# Altium PCB Driver_PCB.PcbDoc
Units mm, origin at the board's own origin, x right, y up, seen from the top; angles counter-clockwise.
Board outline 35.25 x 26.31 mm, 2 copper layers (Top Layer, Bottom Layer); 50 components, 48 nets, 194 pads, 59 vias.
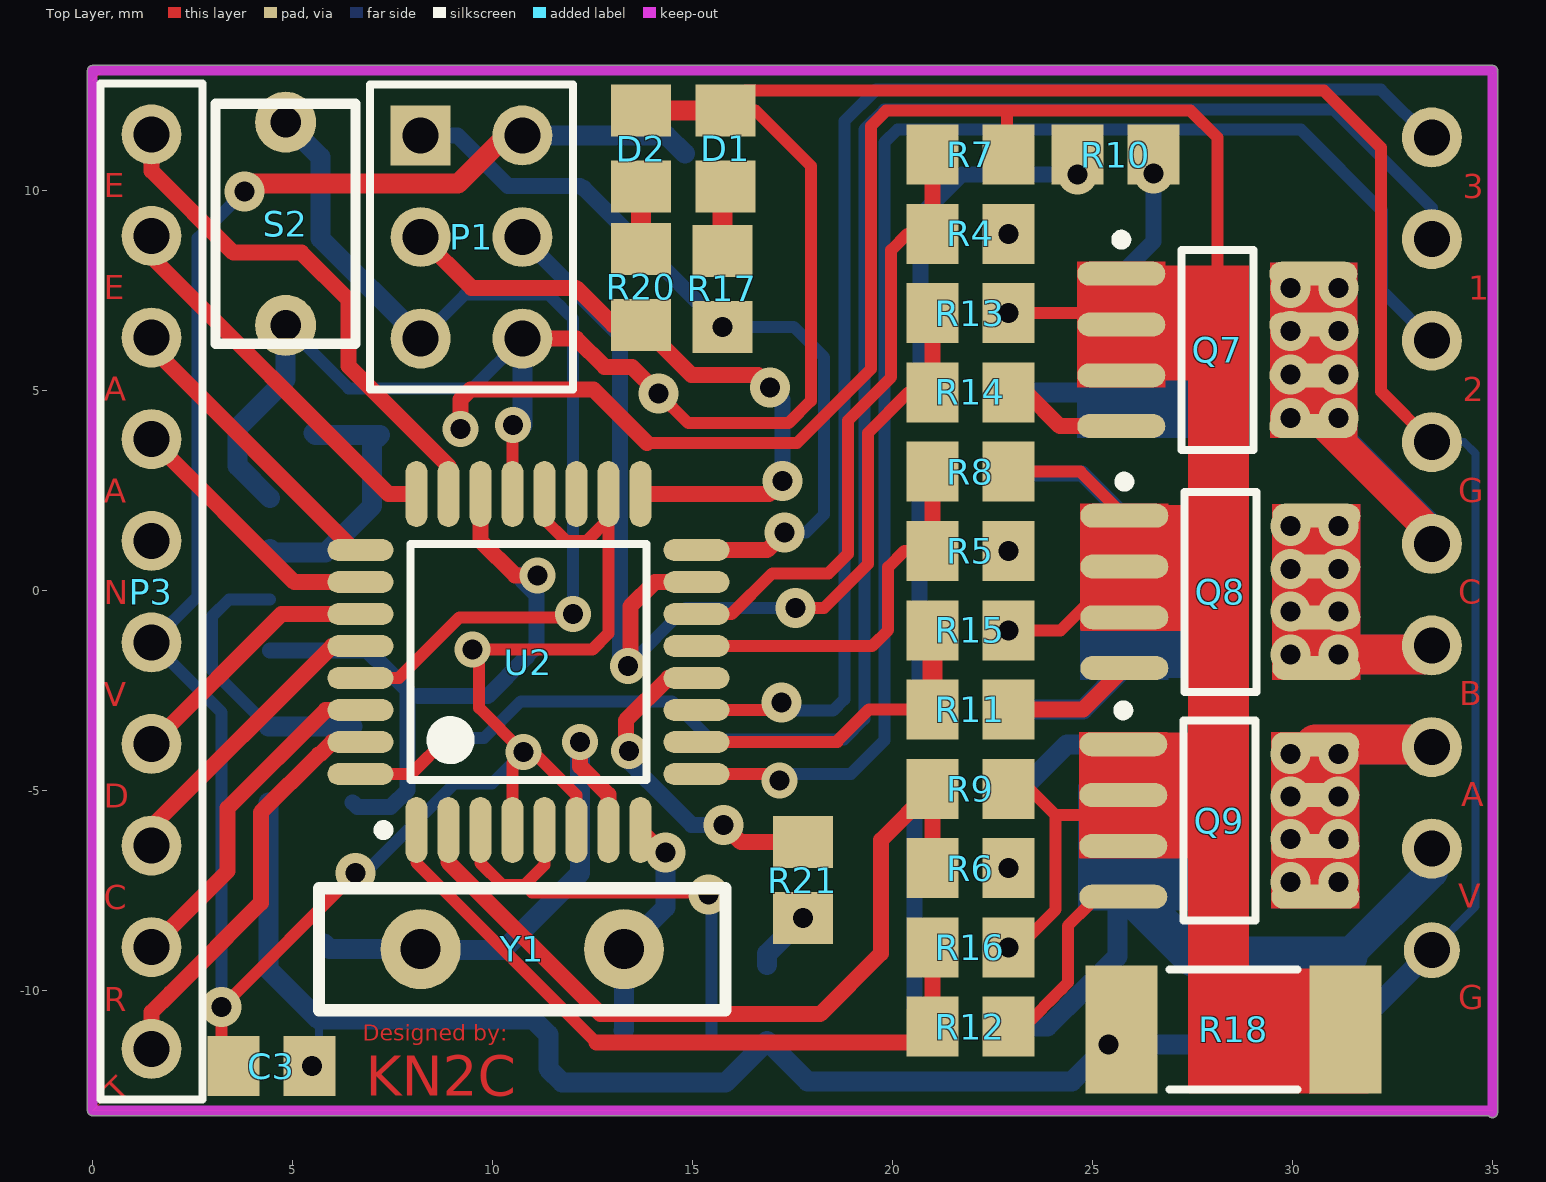
[diagram p0: Top Layer view]
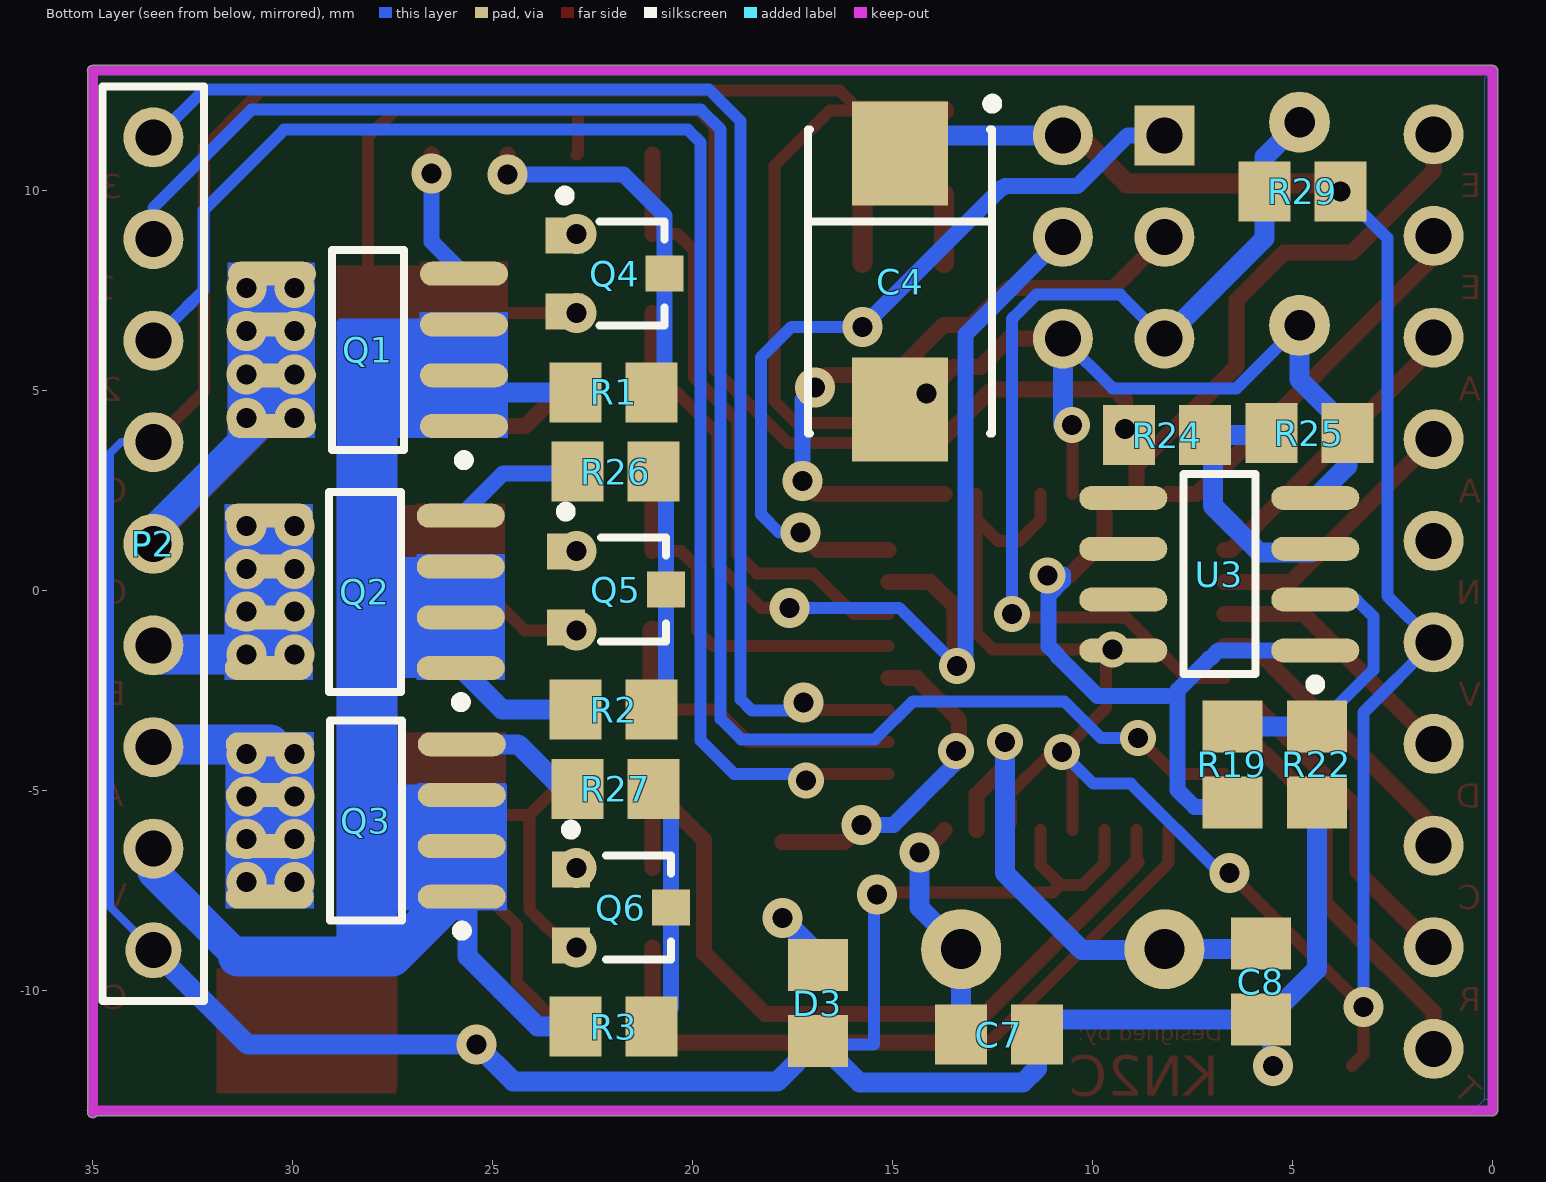
[diagram p1: Bottom Layer view, seen from below]

## Layer stack, top to bottom
Top Layer: signal copper 0.0356
Dielectric: dielectric 0.32, FR-4, Dk 4.8
Bottom Layer: signal copper 0.0356

## Board outline
-0.127,-13 ccw(c0,-13) 0,-13.127 34.895,-13.127 ccw(c34.997,-13.051) 35.125,-13.051 35.125,-13.027 ccw(c35,-13) 35.127,-13 ccw(c35,-13) 35.125,-12.973 35.125,12.949 ccw(c34.997,12.949) 35.123,12.968 ccw(c35,13) 35.127,13 ccw(c35,13) 35,13.127 0,13.127 ccw(c0,13) -0.127,13

## Design rules (kind name [scope] priority, off if disabled: settings)
Clearance Clearance_2 [InPolygon vs InNet('GND')] p1 off: gap=0
Clearance Clearance_1 [InPolygon] p2: gap=0.3
Clearance [All] p3: gap=0.2
FabricationTestPointUsage TestPointUsage [All] p1: valid=0 allowmultiple=FALSE
FabricationTestpoint Testpoint [(IsPad And (OnTopLayer Or OnBottomLayer))] p1: side=3 testpointundercomponent=TRUE minsize=1.016 maxsize=2.54 preferedsize=1.524 minholesize=0 maxholesize=1.016 preferedholesize=0.813 testpointgrid=0.025 allowsidetop=TRUE allowsidebottom=TRUE usegrid=TRUE gridtolerance=0
HoleToHoleClearance [All] p1: gap=0.254 allowstackedmicrovias=FALSE
PolygonConnect [All] p1: connectstyle=Direct reliefconductorwidth=0.254 reliefentries=4 polygonreliefangle="90 Angle" airgapwidth=0.254
RoutingVias [All] p1: holewidth=0.5 width=1 viastyle="Through Hole" minholewidth=0.5 minwidth=0.9 maxholewidth=0.5 maxwidth=1
SilkToSolderMaskClearance SilkscreenOverComponentPads [IsPad] p1: minsilkscreentomaskgap=0.254 clearancetoexposedcopper=TRUE
SolderMaskExpansion [All] p1: expansion=0.102
Width [All] p1: maxlimit=3 minlimit=0.2 preferedwidth=0.2
24 further rules are at their usual default settings.

## Classes and differential pairs
component class Driver_Mosfet: C3 C4 Q1 Q2 Q3 Q4 Q5 Q6 Q7 Q8 Q9 R1 R2 R3 R4 R5 R6 R7 R8 R9 R10 R11 R12 R13 R14 R15 R16 R18 R26 R27
component class Driver_Sheet: C7 C8 D1 D2 D3 P1 P2 P3 R17 R19 R20 R21 R22 R24 R25 R29 S2 U2 U3 Y1

## Components (designator, comment, footprint, x,y, rotation, side; value= is the part's Value field where it differs from the comment)
C3 "Cap_UP" 2012[0805] 4.47,-11.887 r0 top
C4 "Cap_El" 7343 14.808,7.722 r270 bottom
C7 "Cap_UP" 2012[0805] 12.344,-11.1 r0 bottom
C8 "Cap_UP" 2012[0805] 5.791,-9.779 r90 bottom
D1 "Diode" 2012[0805] 15.824,11.049 r90 top
D2 "Diode" 2012[0805] 13.716,11.049 r90 top
D3 "Diode" 2012[0805] 16.866,-10.312 r270 bottom
P1 "Header 3X2" HDRBOX2X3 9.474,8.839 r270 top
P2 "Header 9" HDR1X9 33.48,-8.992 r90 bottom
P3 "Header 10" HDR1X10 1.473,-11.455 r90 top
Q1 "MOSFET-P-8PIN" SO-8_N 28.118,6.016 r0 bottom
Q2 "MOSFET-P-8PIN" SO-8_N 28.194,-0.033 r0 bottom
Q3 "MOSFET-P-8PIN" SO-8_N 28.169,-5.748 r0 bottom
Q4 "2N2222" SOT-23 21.946,7.925 r270 bottom
Q5 "2N2222" SOT-23 21.92,0.025 r270 bottom
Q6 "2N2222" SOT-23 21.793,-7.925 r270 bottom
Q7 "MOSFET-N-8PIN" SO-8_N 28.118,6.016 r0 top
Q8 "MOSFET-N-8PIN" SO-8_N 28.194,-0.033 r0 top
Q9 "MOSFET-N-8PIN" SO-8_N 28.169,-5.748 r0 top
R1 "Res" 2012[0805] 21.971,4.952 r0 bottom
R2 "Res" 2012[0805] 21.971,-2.974 r0 bottom
R3 "Res" 2012[0805] 21.971,-10.9 r0 bottom
R4 "Res" 2012[0805] 21.946,8.915 r180 top
R5 "Res" 2012[0805] 21.946,0.989 r180 top
R6 "Res" 2012[0805] 21.946,-6.937 r180 top
R7 "Res" 2012[0805] 21.946,10.897 r180 top
R8 "Res" 2012[0805] 21.946,2.971 r180 top
R9 "Res" 2012[0805] 21.946,-4.955 r180 top
R10 "Res" 2012[0805] 25.578,10.897 r0 top
R11 "Res" 2012[0805] 21.946,-2.974 r0 top
R12 "Res" 2012[0805] 21.946,-10.9 r0 top
R13 "Res" 2012[0805] 21.946,6.934 r180 top
R14 "Res" 2012[0805] 21.946,4.952 r0 top
R15 "Res" 2012[0805] 21.946,-0.992 r180 top
R16 "Res" 2012[0805] 21.946,-8.918 r180 top
R17 "Res" 2012[0805] 15.748,7.544 r90 top
R18 "DAIL" 6332[2512] 28.524,-10.973 r0 top
R19 "Res" 2012[0805] 6.502,-4.343 r90 bottom
R20 "Res" 2012[0805] 13.716,7.595 r90 top
R21 "Res" 2012[0805] 17.755,-7.239 r270 top
R22 "Res" 2012[0805] 4.394,-4.343 r270 bottom
R24 "Res" 2012[0805] 8.133,3.886 r0 bottom
R25 "Res" 2012[0805] 4.577,3.937 r0 bottom
R26 "Res" 2012[0805] 21.921,2.971 r0 bottom
R27 "Res" 2012[0805] 21.921,-4.956 r0 bottom
R29 "Res" 2012[0805] 4.75,9.982 r180 bottom
S2 "SW-SPST" PUSH-BUT-SMD 4.826,9.169 r180 top
U2 "ATmega88PA-AU" 32A_N 10.897,-1.787 r90 top
U3 "LM358D" 751-02_N 6.833,0.41 r0 bottom
Y1 "XTAL" XTALL 10.744,-8.966 r90 top

## Footprints (in the part's own frame and the unit in brackets; to place one, negate y for a bottom-side part, rotate by r counter-clockwise, add the part's x,y. Pads: shape width x height; smd on the part's side, far side on the other; paste and mask are expansions set on the pad)
32A_N [mm] "Thin QFP, 32-Leads, Body 7x7mm, Pitch 0.8mm, IPC Medium Density"
  oval 1.65x0.55 smd: 1(-4.2,2.8) 2(-4.2,2) 3(-4.2,1.2) 4(-4.2,0.4) 5(-4.2,-0.4) 6(-4.2,-1.2) 7(-4.2,-2) 8(-4.2,-2.8) 17(4.2,-2.8) 18(4.2,-2) 19(4.2,-1.2) 20(4.2,-0.4) 21(4.2,0.4) 22(4.2,1.2) 23(4.2,2) 24(4.2,2.8)
  oval 0.55x1.65 smd: 9(-2.8,-4.2) 10(-2,-4.2) 11(-1.2,-4.2) 12(-0.4,-4.2) 13(0.4,-4.2) 14(1.2,-4.2) 15(2,-4.2) 16(2.8,-4.2) 25(2.8,4.2) 26(2,4.2) 27(1.2,4.2) 28(0.4,4.2) 29(-0.4,4.2) 30(-1.2,4.2) 31(-2,4.2) 32(-2.8,4.2)
  silkscreen extent -4.32,-2.95 2.95,3.75, body extent -3.5,-3.5 3.5,3.5, height 1.2
751-02_N [mm] "SOIC, 8-Leads, Body 4.9x3.9mm, Pitch 1.27mm, IPC Medium Density"
  oval 2.2x0.6 smd: 1(-2.4,1.905) 2(-2.4,0.635) 3(-2.4,-0.635) 4(-2.4,-1.905) 5(2.4,-1.905) 6(2.4,-0.635) 7(2.4,0.635) 8(2.4,1.905)
  silkscreen extent -2.52,-2.5 0.9,2.88, body extent -1.95,-2.45 1.95,2.45, height 1.75
2012[0805] [mm] "Chip Resistor; Body 2.0 x 1.3 mm (LxW typ)"
  rect 1.3x1.5 smd: 1(-0.95,0) 2(0.95,0)
  body extent -1.22,-0.75 1.28,0.75, height 0.5
6332[2512] [mm] "Chip Resistor; Body 6.3 x 3.2 mm (LxW typ)"
  rect 1.8x3.2 smd: 1(-2.8,0) 2(2.8,0)
  silkscreen extent -1.6,-1.5 1.6,1.5, body extent -3.27,-1.6 3.37,1.6, height 0.5
7343 [mm] "Capacitor, SM Tantalum; Body 7.3 x 4.3 mm (LxW typ)"
  rect 2.6x2.4 smd: 1(-3.2,0) 2(3.2,0)
  silkscreen extent -4.57,-2.3 3.8,2.42, body extent -3.9,-2.4 3.9,2.4, height 2
HDR1X9 [mm] "Connector; Header; 9 Position"
  round 1.4 hole 0.9: 1(0,0)
  round 1.5 hole 0.9: 2(2.54,0) 3(5.08,0) 4(7.62,0) 5(10.16,0) 6(12.7,0) 7(15.24,0) 8(17.78,0) 9(20.32,0)
  silkscreen extent -1.27,-1.27 21.59,1.27
HDR1X10 [mm] "Connector; Header; 10 Position"
  round 1.5 hole 0.9: 1(0,0) 2(2.54,0) 3(5.08,0) 4(7.62,0) 5(10.16,0) 6(12.7,0) 7(15.24,0) 8(17.78,0) 9(20.32,0) 10(22.86,0)
  silkscreen extent -1.27,-1.27 24.13,1.27
HDRBOX2X3 [mm]
  rect 1.5x1.5 hole 0.9: 1(-2.54,-1.27)
  round 1.5 hole 0.9: 2(-2.54,1.27) 3(0,-1.27) 4(0,1.27) 5(2.54,-1.27) 6(2.54,1.27)
  silkscreen extent -3.81,-2.54 3.81,2.54
PUSH-BUT-SMD [mil]
  round 60 hole 30: 1(0,-100) 2(0,100)
  silkscreen extent -69,-118 69,118, body extent -69,-118 68,117, height 157
SO-8_N [mm] "8-Pin Small Outline Integrated Circuit 1.27 mm Pitch, IPC Medium Density"
  oval 2.2x0.6 smd: 1(-2.4,1.905) 2(-2.4,0.635) 3(-2.4,-0.635) 4(-2.4,-1.905) 5(2.4,-1.905) 6(2.4,-0.635) 7(2.4,0.635) 8(2.4,1.905)
  silkscreen extent -2.52,-2.5 0.9,2.88, body extent -1.95,-2.45 1.95,2.45, height 1.75
SOT-23 [mm] "SOT-23; 3 Leads; Body 3.0 x 2.6 mm, inc. leads (LxW max)"
  rect 0.9x0.95 smd: 1(0,1.25) 2(-0.95,-1.25) 3(0.95,-1.25)
  silkscreen extent -2.07,-1.38 1.3,1.25, body extent -1.33,-0.38 1.32,1.25, height 2
XTALL [mm]
  round 2 hole 1: 1(0,-2.54) 2(0,2.54)
  silkscreen extent -1.52,-5.08 1.52,5.08

## Part data
C3 C4 C7 C8: "Capacitor"
D1 D2 D3: "1 Amp General Purpose Rectifier"
P1: "Header, 3-Pin, Dual row"
P2: "Header, 9-Pin"
P3: "Header, 10-Pin"
Q1 Q2 Q3: "P-Channel MOSFET"
Q4 Q5 Q6: "NPN Bipolar Transistor"
Q7 Q8 Q9: "N-Channel MOSFET"
R1 R2 R3 R4 R5 R6 R7 R8 R9 R10 R11 R12 R13 R14 R15 R16 R17 R19 R20 R21 R22 R24 R25 R26 R27 R29: "Semiconductor Resistor"
R18: library part Res, "Semiconductor Resistor"
S2: "Single-Pole, Single-Throw Switch"
U2: "8-bit AVR Microcontroller, 8KB Flash, 512 Bytes EEPROM, 1KB SRAM, 32-pin TQFP, Industrial Grade (-40°C to 85°C)"
U3: "Dual Low-Power Operational Amplifier"
Y1: "Crystal Oscillator"

## Via types
v1: diameter 1, hole 0.5, Top Layer to Bottom Layer, 48 vias
v2: diameter 0.9, hole 0.5, Top Layer to Bottom Layer, 11 vias

## Nets (pads, with @x,y where several pads share a name; then routed paths per layer and width w, separated by ;. In a path a pad name is that pad's centre, name@x,y a point inside that pad or via, vN(x,y) a via of type N, cw(c..) or ccw(c..) an arc to the next point about the centre after c; other vN are vias at no path point)
ADD1: P3.8 U2.25 | length 7.5
  Top Layer w0.4: P3.8@1.473,6.237 1.473,6.085 6.545,1.013 U2.25
ADD2: P3.7 U2.26 | length 6.7
  Top Layer w0.4: P3.7 5.045,0.213 U2.26
CURRENT: R19.1 U2.22 U3.1 | length 17
  Top Layer w0.4: U2.22 9.697,1.251 10.566,0.381 v2(11.125,0.381)
  Bottom Layer w0.4: U3.1 6.854,-1.495 7.061,-1.702 7.087,-1.702 7.874,-2.489 7.874,-4.988 7.452,-5.41 6.619,-5.41 R19.1 ; 8.153,-2.642 9.876,-2.642 10.86,-1.657 10.86,-1.634 11.1,-1.394 11.1,-0.113 ; v2@10.744,0.243 11.1,-0.113 ; v2@10.744,0.243 10.744,0.406 v2@10.744,0.243 ; v2@10.744,0.243 11.1,-0.113
CURRENT_SENSE: Q4.3 Q5.3 Q6.3 Q7.1 Q7.2 Q7.3 Q8.1 Q8.2 Q8.3 Q9.1 Q9.2 Q9.3 R7.1 R8.1 R9.1 R13.1 R15.1 R16.1 R18.2 R24.2 | length 53.4
  Top Layer w0.3: 13.462,4.084 13.863,3.683 17.606,3.683 19.456,5.533 19.456,11.612 19.791,11.947 ; 22.86,11.997 22.86,10.932 R7.1 ; v1(22.896,-8.918) 23.136,-8.918 24.079,-7.976 24.079,-5.613 ; R9.1 23.421,-4.955 24.079,-5.613 ; v1(22.896,-0.992) 24.2,-0.992 Q8.2 ; R8.1 24.695,2.971 Q8.1 ; v1(22.896,6.934) 25.436,6.934 Q7.2 ; Q9.2 25.269,-5.613 24.079,-5.613 ; 28.118,6.016 28.118,11.328 27.45,11.997 19.841,11.997 ; 19.791,11.947 19.841,11.997 ; 19.791,11.947 19.841,11.997
  Top Layer w0.4: v2@9.195,4.156 9.195,4.775 9.449,5.029 12.517,5.029 13.863,3.683
  Top Layer w0.5: 25.718,7.515 Q7.1
  Top Layer w0.75: 25.718,6.245 Q7.2 25.718,7.515
  other v2: 9.195,4.039
ENCODER1: P3.10 U2.23 | length 13.1
  Top Layer w0.4: P3.10 1.473,10.491 3.518,8.446 5.219,8.446 6.401,7.264 6.401,5.614 8.897,3.118 U2.23
ENCODER2: P3.9 U2.24 | length 9.6
  Top Layer w0.4: P3.9 1.473,8.339 7.399,2.413 U2.24
GND: C3.2 C4.2 C7.1 C8.1 D1.2 D2.2 D3.2 P1.6 P2.1 P2.6 R18.1 R22.2 R25.1 S2.2 U2.3 U2.5 U2.21 U3.4 | length 127.7
  Top Layer w0.2: C3.2 v1(5.486,-11.887)
  Top Layer w0.3: U2.3 9.697,-6.811 10.244,-7.358 10.803,-7.358 ; U2.21 v2@10.497,3.88 ; U2.5 11.297,-6.864 10.803,-7.358 ; v1(14.148,4.928) 14.892,4.183 17.399,4.183 17.958,4.742 17.958,10.617 16.576,11.999 D1.2 16.322,12.497 30.785,12.497 32.21,11.072 ; v1(15.392,-7.595) 15.342,-7.544 10.989,-7.544 10.803,-7.358 ; 31.013,12.268 32.21,11.072 ; P2.6 32.21,4.978 32.21,11.072
  Top Layer w0.4: P1.6 12.096,6.299 12.8,5.595 13.481,5.595 v1(14.148,4.928)
  Top Layer w0.5: D2.2 D1.2
  Bottom Layer w0.2: v1(5.486,-11.887) 5.655,-11.719 C8.1@5.655,-10.729 ; P2.1 34.57,-7.901 34.57,3.429 34.291,3.708 P2.6
  Bottom Layer w0.3: S2.2 6.401,5.055 9.5,5.055 P1.6 ; v1(15.392,-7.595) 15.469,-7.671 15.469,-11.354 16.774,-11.354 D3.2
  Bottom Layer w0.5: R22.2 4.394,-9.468 5.655,-10.729 C8.1 11.024,-10.729 C7.1 11.394,-11.953 11.741,-12.3 14.685,-12.3 15.828,-12.3 D3.2@16.774,-11.354 ; U3.4 3.627,3.12 R25.1 3.627,4.073 4.826,5.272 S2.2 ; v2@10.744,4.14 P1.6 ; D3.2 17.871,-12.268 24.486,-12.268 v1(25.4,-11.354) 31.118,-11.354 P2.1
  other v2: 10.516,4.14
HALL1: P2.8 U2.32 | length 44.9
  Top Layer w0.3: U2.32 7.961,-4.587 v2(8.865,-3.683)
  Bottom Layer w0.3: v2(8.865,-3.683) 9.792,-3.683 10.706,-2.769 14.491,-2.769 15.442,-3.72 18.784,-3.72 19.296,-3.208 19.296,11.528 19.791,12.023 31.026,12.023 33.48,9.569 P2.8
HALL2: P2.7 U2.9 | length 37.8
  Top Layer w0.3: U2.9 v2@17.156,-4.587 ; v2@17.007,-4.587 v2(17.17,-4.75)
  Bottom Layer w0.3: v2@17.156,-4.587 18.959,-4.587 19.796,-3.75 19.796,11.201 20.118,11.523 30.209,11.523 32.233,9.5 32.233,7.496 32.334,7.394 ; 32.64,7.088 32.334,7.394 ; P2.7 32.334,7.394
HALL3: P2.9 U2.11 | length 34.7
  Top Layer w0.3: U2.11 v1@16.978,-2.987
  Bottom Layer w0.3: v1@17.094,-2.997 18.517,-2.997 18.796,-2.718 18.796,11.735 19.584,12.523 31.233,12.523 ; 30.226,12.523 31.233,12.523 ; P2.9 33.401,11.328 32.206,12.523 31.233,12.523
  other v1: 17.221,-2.794
LED1: R21.1 U2.12 | length 8.8
  Top Layer w0.4: v2@13.335,-4.013 13.335,-3.244 14.392,-2.187 U2.12 ; v1(15.773,-5.857) 16.205,-6.289 R21.1
  Bottom Layer w0.4: v2(13.411,-4.013) 13.411,-4.293 13.614,-4.496 ; 13.894,-4.775 13.614,-4.496 ; v1(15.773,-5.857) 14.976,-5.857 13.614,-4.496
LED2: P1.1 R17.1 U2.16 | length 20
  Top Layer w0.4: U2.16 16.863,1.013 v1(17.297,1.448)
  Bottom Layer w0.2: v1@15.664,6.51 v1@15.748,6.426
  Bottom Layer w0.3: v1(15.748,6.594) 17.526,6.594 18.288,5.832 18.288,1.905 17.831,1.448 v1(17.297,1.448)
  Bottom Layer w0.4: P1.1 9.118,11.379 10.388,10.109 12.192,10.109 12.243,10.058 12.283,10.058 v1(15.748,6.594)
LED3: P1.3 R20.1 U2.17 | length 16
  Top Layer w0.4: P1.3 9.474,7.569 12.09,7.569 13.015,6.645 R20.1 14.976,5.385 v1@16.637,5.385 ; U2.17 16.917,2.413 v1(17.247,2.743)
  Bottom Layer w0.4: v1@16.967,5.08 16.967,5.055 17.247,4.775 v1(17.247,2.743)
  other v1: 16.942,5.08
M1N: R12.1 R16.2 U2.1 | length 31
  Top Layer w0.3: U2.1 8.097,-6.801 12.598,-11.303
  Top Layer w0.4: 16.053,-11.303 16.789,-11.303 ; R16.2 R12.1 20.593,-11.303 16.789,-11.303 ; 12.598,-11.303 16.789,-11.303 ; 12.598,-11.303 16.789,-11.303 ; 12.598,-11.303 16.789,-11.303 ; 12.598,-11.303 16.789,-11.303
M1P: R6.2 R9.2 U2.2 | length 24.4
  Top Layer w0.3: U2.2@8.897,-6.788 U2.2
  Top Layer w0.4: U2.2@8.897,-6.788 12.7,-10.592 ; 16.129,-10.592 16.408,-10.592 ; R6.2 R9.2 19.71,-6.241 19.71,-9.068 18.186,-10.592 16.408,-10.592 ; 12.7,-10.592 16.408,-10.592 ; 12.7,-10.592 16.408,-10.592
M2N: R11.1 R15.2 U2.10 | length 18.8
  Top Layer w0.3: 18.593,-3.787 19.406,-2.974 R11.1 ; U2.10 18.618,-3.787 ; U2.10 18.618,-3.787 ; U2.10 18.618,-3.787 ; U2.10 18.618,-3.787
  Top Layer w0.5: R11.1 R15.2
M2P: R5.2 R8.2 U2.13 | length 9.8
  Top Layer w0.3: U2.13 19.492,-1.387 19.888,-0.991 19.888,0.584 20.293,0.989 R5.2
  Top Layer w0.4: R5.2 R8.2
M3N: P1.4 R13.2 R14.1 U2.15 | length 29.6
  Top Layer w0.3: v1(17.577,-0.432) 18.288,-0.432 19.38,0.66 19.38,3.937 20.395,4.952 R14.1
  Top Layer w0.4: v2(13.386,-1.88) 13.447,-1.819 13.447,-0.396 14.056,0.213 U2.15 ; R14.1 R13.2
  Bottom Layer w0.3: v2(13.386,-1.88) 14.834,-0.432 v1(17.577,-0.432)
  Bottom Layer w0.4: P1.4 13.183,6.401 13.183,-1.677 v2(13.386,-1.88)
M3P: R4.2 R7.2 U2.14 | length 15.6
  Top Layer w0.3: U2.14 15.974,-0.587 16.993,0.432 18.398,0.432 18.88,0.914 18.88,4.25 19.964,5.334 19.964,8.509 20.371,8.915 R4.2
  Top Layer w0.4: R4.2 R7.2
NetC7_2: C7.2 U2.8 Y1.1 | length 5.7
  Top Layer w0.4: U2.8 14.263,-6.553 v1(14.326,-6.553)
  Bottom Layer w0.5: C7.2@13.269,-10.998 13.284,-10.983 Y1.1 14.326,-7.925 v1(14.326,-6.553)
NetC8_2: C8.2 U2.7 Y1.2 | length 13
  Top Layer w0.4: v2(12.192,-3.785) 12.192,-4.394 12.897,-5.099 U2.7
  Bottom Layer w0.5: C8.2 5.928,-8.966 Y1.2 8.23,-8.992 10.262,-8.992 12.192,-7.061 v2(12.192,-3.785)
NetD1_1: D1.1 R17.2 | length 1.7
  Top Layer w0.5: R17.2@15.748,8.189 D1.1@15.748,9.896
NetD2_1: D2.1 R20.2 | length 1.7
  Top Layer w0.5: R20.2@13.716,8.189 D2.1@13.716,9.896
NetD3_1: D3.1 R21.2 | length 1.5
  Bottom Layer w0.5: D3.1 16.866,-9.078 v1(17.755,-8.189)
NetQ1_4: Q1.4 R10.2 | length 3.3
  Top Layer w0.4: v1(26.528,10.429) R10.2
  Bottom Layer w0.4: Q1.4 26.528,8.731 v1(26.528,10.429)
NetQ2_4: Q2.4 R26.2 | length 3.4
  Bottom Layer w0.4: R26.2 22.91,2.931 24.734,2.931 Q2.4
NetQ3_4: Q3.4 R27.2 | length 3.4
  Bottom Layer w0.5: R27.2 23.248,-4.956 24.36,-3.843 Q3.4
NetQ4_1: Q4.1 R1.1 R10.1 | length 9.4
  Top Layer w0.4: v1(24.628,10.404) R10.1
  Bottom Layer w0.4: R1.1 20.696,5.277 Q4.1 20.696,9.367 21.732,10.404 v1(24.628,10.404)
NetQ4_2: Q4.2 R4.1
  other v1: 22.896,8.915
NetQ5_1: Q5.1 R2.1 R26.1 | length 6.2
  Bottom Layer w0.4: R26.1 20.67,2.67 Q5.1 20.67,-2.624 R2.1
NetQ5_2: Q5.2 R5.1
  other v1: 22.896,0.989
NetQ6_1: Q6.1 R3.1 R27.1 | length 6.3
  Bottom Layer w0.4: R27.1 20.543,-5.383 Q6.1 20.543,-10.423 R3.1
NetQ6_2: Q6.2 R6.1
  other v1: 22.896,-6.937
NetQ7_4: Q7.4 R14.2 | length 3.2
  Top Layer w0.4: R14.2 23.343,4.952 24.184,4.111 Q7.4
NetQ8_4: Q8.4 R11.2 | length 3.3
  Top Layer w0.4: R11.2 24.758,-2.974 Q8.4
NetQ9_4: Q9.4 R12.2 | length 5.9
  Top Layer w0.3: R12.2 R12.2@23.288,-10.9 ; 23.901,-10.287 24.232,-9.957 ; Q9.4@24.917,-7.849 24.384,-8.382 24.384,-9.804 24.232,-9.957 ; R12.2@23.288,-10.9 24.232,-9.957 ; R12.2@23.288,-10.9 24.232,-9.957
NetR19_2: R19.2 R22.1 U3.2 | length 7.1
  Bottom Layer w0.3: R22.1 2.983,-1.982 2.983,-0.65 3.407,-0.225 U3.2
  Bottom Layer w0.5: R22.1 R19.2
NetR24_1: R24.1 R25.2 U3.3 | length 6.6
  Bottom Layer w0.5: U3.3 4.525,0.952 5.829,0.952 6.985,2.108 6.985,3.688 R24.1 5.578,3.886 R25.2
PHASEA: P2.3 Q3.5 Q3.6 Q3.7 Q3.8 Q9.5 Q9.6 Q9.7 Q9.8 | length 6.8
  Top Layer w0.4: Q9.8@30.569,-3.781 Q9.8@30.611,-3.824 ; Q9.8@30.611,-3.781 Q9.8@31.471,-3.781
  Top Layer w1: Q9.8 33.412,-3.843 P2.3
  Bottom Layer w1: Q3.5 33.412,-3.843 P2.3
  other v1: 29.947,-7.282 31.153,-7.282 29.947,-6.215 31.153,-6.215 29.947,-5.148 31.153,-5.148 29.947,-4.081 31.153,-4.081
PHASEB: P2.4 Q2.5 Q2.6 Q2.7 Q2.8 Q8.5 Q8.6 Q8.7 Q8.8 | length 7.7
  Top Layer w1: 30.594,-1.026 Q8.6 ; Q8.7@30.594,0.567 Q8.6 ; Q8.7@30.594,0.592 Q8.7 Q8.6 ; v1@31.128,-1.592 33.259,-1.592 P2.4
  Bottom Layer w1: v1(31.153,-1.592) 33.259,-1.592 P2.4
  other v1: 29.947,-1.592 29.947,-0.525 31.153,-0.525 29.947,0.541 31.153,0.541 29.947,1.608 31.153,1.608
PHASEC: P2.5 Q1.5 Q1.6 Q1.7 Q1.8 Q7.5 Q7.6 Q7.7 Q7.8 | length 10.9
  Top Layer w0.75: Q7.6 30.518,4.407 33.48,1.445 P2.5
  Bottom Layer w0.75: Q1.7 30.518,4.458 33.48,1.496 P2.5
  other v1: 29.947,4.318 31.153,4.318 29.947,5.402 31.153,5.402 29.947,6.485 31.153,6.485 29.947,7.569 31.153,7.569
RESET: P1.5 R29.1 S2.1 U2.29 | length 25.5
  Top Layer w0.3: U2.29 7.655,-2.187 9.168,-0.673 v2@11.925,-0.673
  Bottom Layer w0.3: P1.5 9.304,7.399 11.406,7.399 ; 11.651,7.155 11.844,6.961 ; v2(12.014,-0.584) 12.014,6.791 11.844,6.961 ; 11.406,7.399 11.844,6.961 ; 11.406,7.399 11.844,6.961
  Bottom Layer w0.5: S2.1 5.7,10.836 R29.1 5.7,8.804 P1.5
RX: P3.2 U2.30 | length 8.6
  Top Layer w0.4: P3.2 3.378,-7.01 3.378,-5.436 5.827,-2.987 U2.30
TWI_CLK: P3.3 U2.28 | length 7.6
  Top Layer w0.4: P3.3 1.473,-5.906 5.992,-1.387 U2.28
TWI_DATA: P3.4 U2.27 | length 6.6
  Top Layer w0.4: P3.4 4.722,-0.587 U2.27
TX: P3.1 U2.31 | length 12.3
  Top Layer w0.4: P3.1 1.473,-10.542 1.95,-10.065 ; 3.379,-8.636 1.95,-10.065 ; U2.31 5.992,-3.787 5.677,-4.102 5.652,-4.102 4.208,-5.546 4.208,-7.807 1.95,-10.065
VCC: C3.1 C4.1 P1.2 P3.5 R29.2 U2.4 U2.6 U2.18 U2.20 U3.8 | length 64.3
  Top Layer w0.3: C3.1 3.226,-11.593 v1(3.226,-10.414) v1(6.579,-7.061) ; U2.4 10.497,-4.312 v2(10.77,-4.039) ; U2.20 11.297,1.779 11.838,1.238 12.355,1.238 U2.18@12.897,1.779 ; U2.6@12.04,-5.817 U2.6@12.04,-5.296 ; U2.6 12.097,-5.112 11.024,-4.039 v2(10.77,-4.039) ; U2.18 U2.18@12.897,1.779 ; v2(10.77,-4.039) 9.665,-2.934 9.665,-1.638 v2(9.5,-1.473) 12.497,-1.473 12.897,-1.073 U2.18@12.897,1.779
  Top Layer w0.5: v1(3.8,9.982) 3.997,10.179 9.141,10.179 10.341,11.379 P1.2
  Bottom Layer w0.3: v1(3.226,-10.414) 3.226,-3.048 P3.5 2.627,-0.141 2.627,8.81 v1(3.8,9.982) ; v1(6.579,-7.061) 6.807,-7.061 9.042,-4.826 9.982,-4.826 ; 9.398,-4.826 9.982,-4.826 ; v2(10.77,-4.039) 9.982,-4.826
  Bottom Layer w0.5: P1.2 14.351,11.379 C4.1
VDD: P2.2 Q1.1 Q1.2 Q1.3 Q2.1 Q2.2 Q2.3 Q3.1 Q3.2 Q3.3 R1.2 R2.2 R3.2 | length 24.3
  Top Layer w1: P2.2@33.412,-6.383 P2.2
  Bottom Layer w0.5: R3.2 23.873,-10.9 24.79,-9.982 25.629,-9.144 25.629,-6.883 ; R2.2 24.758,-2.974 Q2.1 ; R1.2 24.877,4.952 Q1.1 ; Q3.1@25.769,-7.896 Q3.1 ; 25.794,-1.577 Q2.2
  Bottom Layer w0.8: Q3.1@25.769,-7.404 Q3.2 ; 31.369,-9.144 33.48,-7.033 P2.2
  Bottom Layer w1: Q3.1@25.769,-7.404 27.508,-9.144 31.369,-9.144
pads on no net: P3.6 U2.19 U3.5 U3.6 U3.7

## Polygon pours and split planes (outlines as drawn)
GND on Bottom Layer "Bottom Layer-No Net" (solid, remove dead copper, shelved, pour order 12): -0.025,-12.675 0.025,-12.725 0.203,-12.725 0.529,-13.051 34.997,-13.051 35,-13.048 35,13 0,13 0.203,12.797 0.203,-12.725
GND on Top Layer "Bottom Layer-No Net" (solid, remove dead copper, shelved, pour order 14): 0,12.751 0.198,12.949 34.997,12.949 35,12.946 35,-13 0,-13 0.203,-12.797 0.203,12.675

## Keep-outs
Keep-Out Layer:
  lines w0.254: 34.997,-13.051 34.997,12.949 ; 35,-13 0,-13 0,13 35,13

## Other copper
Top Layer:
  rectangle net CURRENT_SENSE: 24.663,-6.685 26.873,-3.535
  rectangle net CURRENT_SENSE: 24.689,-0.97 26.899,2.18
  rectangle net CURRENT_SENSE: 24.613,5.08 26.822,8.23
  rectangle net PHASEA: 29.464,-7.95 31.674,-3.531
  rectangle net PHASEB: 29.489,-2.235 31.699,2.159
  rectangle net PHASEC: 29.439,3.81 31.623,8.204
  rectangle net CURRENT_SENSE: 24.701,-1.008 28.88,2.142
  rectangle net CURRENT_SENSE: 24.676,-6.698 28.702,-3.548
  rectangle net CURRENT_SENSE: 27.381,-8.198 28.905,8.128
  rectangle net CURRENT_SENSE: 27.407,-12.573 31.902,-9.449
  rectangle net CURRENT_SENSE: 27.381,-12.395 28.905,-6.782
  rectangle net CURRENT_SENSE: 24.663,5.258 28.067,8.128
  pour cut-out: 23.597,-7.163 23.597,-9.398 26.568,-9.398 26.594,-13.056 27.127,-13.081 34.919,-13.081 35,-13 35,0.215 23.431,0.215 23.419,0.203
  pour cut-out: 27.407,13.081 27.407,7.312 34.752,-0.033 35,0.215 35,13
  text "E" at 0.279,9.83 h0.6
  text "3" at 34.252,9.804 h0.6
  text "E" at 0.279,7.287 h0.6
  text "1" at 34.395,7.271 h0.6
  text "A" at 0.279,4.743 h0.6
  text "2" at 34.252,4.737 h0.6
  text "A" at 0.279,2.2 h0.6
  text "G" at 34.138,2.203 h0.6
  text "N" at 0.279,-0.343 h0.6
  text "C" at 34.138,-0.33 h0.6
  text "B" at 34.166,-2.864 h0.6
  text "V" at 0.279,-2.886 h0.6
  text "A" at 34.223,-5.397 h0.6
  text "D" at 0.279,-5.429 h0.6
  text "V" at 34.138,-7.931 h0.6
  text "C" at 0.279,-7.972 h0.6
  text "G" at 34.138,-10.465 h0.6
  text "R" at 0.279,-10.516 h0.6
  text "Designed by:" at 6.756,-11.252 h0.4
  text "KN2C" at 6.833,-12.624 h1
  text "T" at 0.66,-12.878 h0.6 r45
Bottom Layer:
  rectangle net VDD: 24.663,-7.955 26.873,-4.805
  rectangle net VDD: 24.689,-2.24 26.899,0.91
  rectangle net VDD: 24.613,3.81 26.822,6.96
  rectangle net VDD: 24.689,-2.184 28.626,0.838
  rectangle net VDD: 24.638,-8.001 28.905,-4.851
  rectangle net VDD: 24.714,3.81 28.854,6.807
  rectangle net VDD: 27.381,-9.525 28.905,6.756
  rectangle net PHASEA: 29.464,-7.95 31.674,-3.531
  rectangle net PHASEB: 29.489,-2.235 31.699,2.159
  rectangle net PHASEC: 29.439,3.81 31.623,8.204
  pour cut-out: 34.752,7.171 34.752,-7.237 32.066,-9.923 26.027,-9.923 24.079,-7.976 24.206,-7.849 24.206,7.29